# Altium PCB PCB1.PcbDoc (part 2 of 2)
Units mil, origin at the board's own origin, x right, y up, seen from the top; angles counter-clockwise.
Board outline 4538.24 x 3362.8 mil, 2 copper layers (Top Layer, Bottom Layer); 199 components, 229 nets, 1313 pads, 0 vias.
Unrouted connection lines stored in the file: 1024.
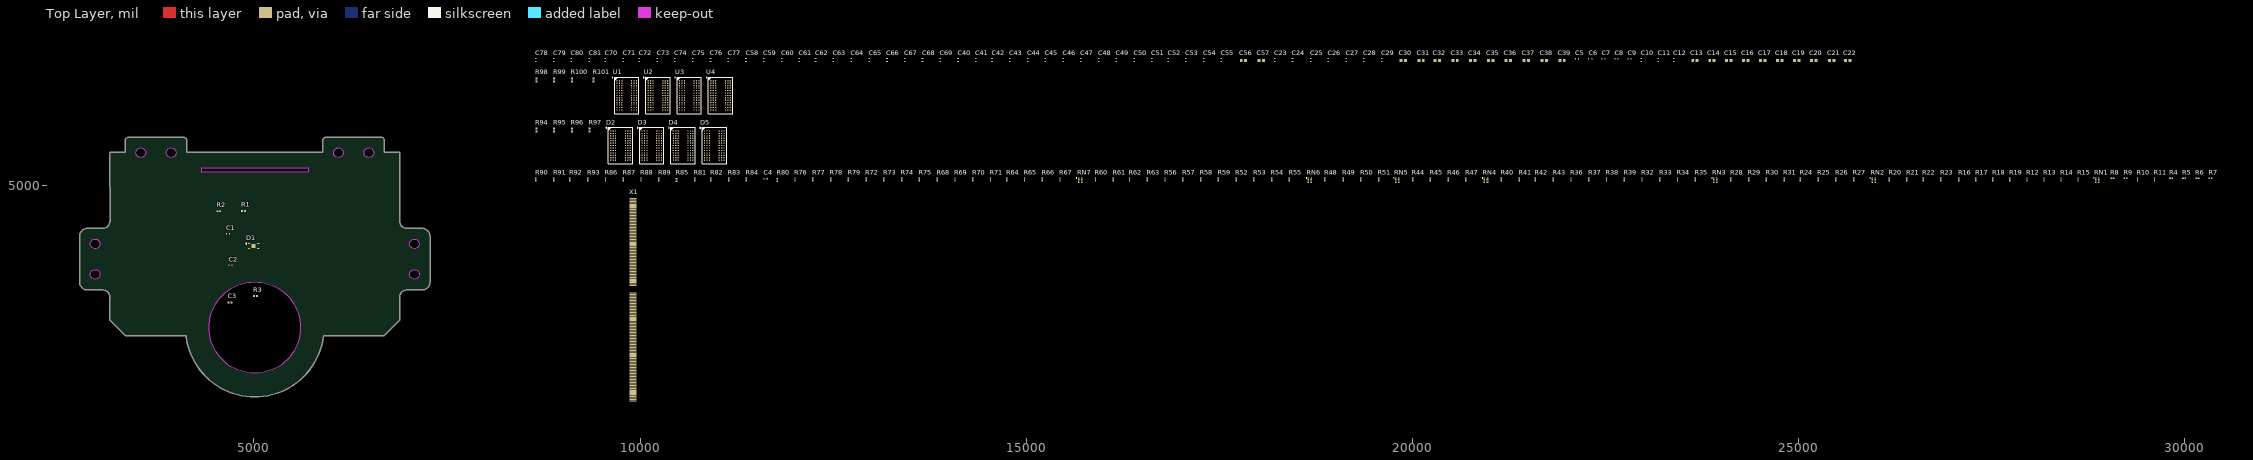
[diagram p0: Top Layer view]

## Nets (pads, with @x,y where several pads share a name; then routed paths per layer and width w, separated by ;. In a path a pad name is that pad's centre, name@x,y a point inside that pad or via, vN(x,y) a via of type N, cw(c..) or ccw(c..) an arc to the next point about the centre after c; other vN are vias at no path point) (continued)
GND: C1.2 C2.1 C13.1 C14.1 C15.1 C16.1 C17.1 C18.1 C19.1 C20.1 C21.1 C22.1 C30.1 C31.1 C32.1 C33.1 C34.1 C35.1 C36.1 C37.1 C38.1 C39.1 C40.1 C41.1 C42.1 C43.1 C44.1 C45.1 C46.1 C47.1 C48.1 C49.1 C50.1 C51.1 C52.1 C53.1 C54.1 C55.1 C58.1 C59.1 C60.1 C61.1 C62.1 C63.1 C64.1 C65.1 C66.1 C67.1 C68.1 C69.1 C70.1 C71.1 C72.1 C73.1 C74.1 C75.1 C76.1 C77.1 C78.1 C79.1 C80.1 C81.1 D1.4 D1.9 D2.A2 D2.A8 D2.A9 D2.C8 D2.D1 D2.D9 D2.E1 D2.E9 D2.G1 D2.G9 D2.H9 D2.K1 D2.K9 D2.N1 D3.A2 D3.A8 D3.A9 D3.C8 D3.D1 D3.D9 D3.E1 D3.E9 D3.G1 D3.G9 D3.H9 D3.K1 D3.K9 D3.N1 D4.A2 D4.A8 D4.A9 D4.C8 D4.D1 D4.D9 D4.E1 D4.E9 D4.G1 D4.G9 D4.H9 D4.K1 D4.K9 D4.N1 D5.A2 D5.A8 D5.A9 D5.C8 D5.D1 D5.D9 D5.E1 D5.E9 D5.G1 D5.G9 D5.H9 D5.K1 D5.K9 D5.N1 R94.1 R95.1 R96.1 R97.1 R98.1 R99.1 R100.1 R101.1 U1.A2 U1.A8 U1.A9 U1.C8 U1.D1 U1.D9 U1.E1 U1.E9 U1.G1 U1.G9 U1.H9 U1.K1 U1.K9 U1.N1 U2.A2 U2.A8 U2.A9 U2.C8 U2.D1 U2.D9 U2.E1 U2.E9 U2.G1 U2.G9 U2.H9 U2.K1 U2.K9 U2.N1 U3.A2 U3.A8 U3.A9 U3.C8 U3.D1 U3.D9 U3.E1 U3.E9 U3.G1 U3.G9 U3.H9 U3.K1 U3.K9 U3.N1 U4.A2 U4.A8 U4.A9 U4.C8 U4.D1 U4.D9 U4.E1 U4.E9 U4.G1 U4.G9 U4.H9 U4.K1 U4.K9 U4.N1 X1.1 X1.2 X1.5 X1.6 X1.9 X1.10 X1.14 X1.15 X1.18 X1.19 X1.22 X1.23 X1.26 X1.27 X1.30 X1.31 X1.35 X1.36 X1.39 X1.40 X1.43 X1.44 X1.47 X1.48 X1.51 X1.52 X1.56 X1.57 X1.60 X1.61 X1.64 X1.65 X1.68 X1.69 X1.72 X1.73 X1.77 X1.78 X1.81 X1.82 X1.85 X1.86 X1.89 X1.90 X1.93 X1.94 X1.98 X1.99 X1.102 X1.103 X1.106 X1.107 X1.167 X1.168 X1.171 X1.172 X1.175 X1.176 X1.180 X1.181 X1.184 X1.185 X1.188 X1.189 X1.192 X1.193 X1.196 X1.197 X1.201 X1.202 X1.205 X1.206 X1.209 X1.210 X1.213 X1.214 X1.217 X1.218 X1.222 X1.223 X1.226 X1.227 X1.230 X1.231 X1.234 X1.235 X1.238 X1.239 X1.243 X1.244 X1.247 X1.248 X1.251 X1.252
MEMRST: C1.1 D2.L1 D3.L1 D4.L1 D5.L1 R1.2 U1.L1 U2.L1 U3.L1 U4.L1
NetC4_1: C4.1 R80.2 R85.2
ODT0: D2.F3 D3.F3 D4.F3 D5.F3 RN1.2 U1.F3 U2.F3 U3.F3 U4.F3 X1.155
PARITY: D2.N3 D3.N3 D4.N3 D5.N3 RN6.2 U1.N3 U2.N3 U3.N3 U4.N3 X1.143
RESET_CONN: R1.1 X1.108
S0: D2.G7 D3.G7 D4.G7 D5.G7 RN1.1 U1.G7 U2.G7 U3.G7 U4.G7 X1.149
SA0: D1.1 X1.256
SA1: D1.2 X1.260
SA2: D1.3 X1.166
SCL: D1.6 X1.253
SDA: D1.5 X1.254
VDD: C4.2 C5.1 C6.1 C7.1 C8.1 C9.1 C10.1 C11.1 C12.1 C13.2 C14.2 C15.2 C16.2 C17.2 C18.2 C19.2 C20.2 C21.2 C22.2 C23.1 C24.1 C25.1 C26.1 C27.1 C28.1 C29.1 C56.1 C57.1 C58.2 C59.2 C60.2 C61.2 C62.2 C63.2 C64.2 C65.2 C66.2 C67.2 C68.2 C69.2 C70.2 C71.2 C72.2 C73.2 C74.2 C75.2 C76.2 C77.2 C78.2 C79.2 C80.2 C81.2 D2.A1 D2.B2 D2.B8 D2.C1 D2.C7 D2.C9 D2.E2 D2.E8 D2.F1 D2.F9 D2.H1 D2.J9 D2.M1 D2.N9 D3.A1 D3.B2 D3.B8 D3.C1 D3.C7 D3.C9 D3.E2 D3.E8 D3.F1 D3.F9 D3.H1 D3.J9 D3.M1 D3.N9 D4.A1 D4.B2 D4.B8 D4.C1 D4.C7 D4.C9 D4.E2 D4.E8 D4.F1 D4.F9 D4.H1 D4.J9 D4.M1 D4.N9 D5.A1 D5.B2 D5.B8 D5.C1 D5.C7 D5.C9 D5.E2 D5.E8 D5.F1 D5.F9 D5.H1 D5.J9 D5.M1 D5.N9 R2.2 U1.A1 U1.B2 U1.B8 U1.C1 U1.C7 U1.C9 U1.E2 U1.E8 U1.F1 U1.F9 U1.H1 U1.J9 U1.M1 U1.N9 U2.A1 U2.B2 U2.B8 U2.C1 U2.C7 U2.C9 U2.E2 U2.E8 U2.F1 U2.F9 U2.H1 U2.J9 U2.M1 U2.N9 U3.A1 U3.B2 U3.B8 U3.C1 U3.C7 U3.C9 U3.E2 U3.E8 U3.F1 U3.F9 U3.H1 U3.J9 U3.M1 U3.N9 U4.A1 U4.B2 U4.B8 U4.C1 U4.C7 U4.C9 U4.E2 U4.E8 U4.F1 U4.F9 U4.H1 U4.J9 U4.M1 U4.N9 X1.111 X1.112 X1.117 X1.118 X1.123 X1.124 X1.129 X1.130 X1.135 X1.136 X1.141 X1.142 X1.147 X1.148 X1.153 X1.154 X1.159 X1.160 X1.163
VDDSPD: C2.2 D1.8 X1.255
VPP: C30.2 C31.2 C32.2 C33.2 C34.2 C35.2 C36.2 C37.2 C38.2 C39.2 C40.2 C41.2 C42.2 C43.2 C44.2 C45.2 C46.2 C47.2 C48.2 C49.2 C50.2 C51.2 C52.2 C53.2 C54.2 C55.2 D2.B1 D2.M9 D3.B1 D3.M9 D4.B1 D4.M9 D5.B1 D5.M9 U1.B1 U1.M9 U2.B1 U2.M9 U3.B1 U3.M9 U4.B1 U4.M9 X1.257 X1.259
VREFCA: C5.2 C6.2 C7.2 C8.2 C9.2 C10.2 C11.2 C12.2 D2.J1 D3.J1 D4.J1 D5.J1 U1.J1 U2.J1 U3.J1 U4.J1 X1.164
VTT: C23.2 C24.2 C25.2 C26.2 C27.2 C28.2 C29.2 C56.2 C57.2 RN1.5 RN1.6 RN1.7 RN1.8 RN2.5 RN2.6 RN2.7 RN2.8 RN3.5 RN3.6 RN3.7 RN3.8 RN4.5 RN4.6 RN4.7 RN4.8 RN5.5 RN5.6 RN5.7 RN5.8 RN6.5 RN6.6 RN6.7 RN6.8 RN7.5 RN7.6 RN7.7 RN7.8 X1.258
ZQ0: D2.B9 R94.2
ZQ1: D3.B9 R95.2
ZQ2: D4.B9 R96.2
ZQ3: D5.B9 R97.2
ZQ4: R98.2 U1.B9
ZQ5: R99.2 U2.B9
ZQ6: R100.2 U3.B9
ZQ7: R101.2 U4.B9
pads on no net: D1.7 D2.A3 D2.F2 D2.G2 D2.G8 D2.N7 D3.A3 D3.F2 D3.G2 D3.G8 D3.N7 D4.A3 D4.F2 D4.G2 D4.G8 D4.N7 D5.A3 D5.F2 D5.G2 D5.G8 D5.N7 RN1.3 RN4.4 U1.A3 U1.F2 U1.G2 U1.G8 U1.N7 U2.A3 U2.F2 U2.G2 U2.G8 U2.N7 U3.A3 U3.F2 U3.G2 U3.G8 U3.N7 U4.A3 U4.F2 U4.G2 U4.G8 U4.N7 X1.87 X1.88 X1.91 X1.92 X1.95 X1.96 X1.97 X1.100 X1.101 X1.104 X1.105 X1.110 X1.134 X1.157 X1.161 X1.162 X1.165

## Silkscreen, mask and mechanical layers (free items; w line width, h text height)
Mechanical 16:
  drawing of 1874 lines, arcs and shapes, not listed
  text "1" at 1427,7465 h70
  text "2" at 4287,7465 h70
  text "3" at 7167,7465 h70
  text "4" at 10037,7465 h70
  text "A" at 75,6559 h70
  text "A" at 11375,6559 h70
  text "B" at 75,4667 h70
  text "B" at 11375,4667 h70
  text "C" at 75,2757 h70
  text "C" at 11375,2757 h70
  text "ENGINEER:" at 6850,1300 h45
  text "TITLE:" at 8350,1300 h45
  text "PCB DESIGNER:" at 6850,1005 h45
  text "D" at 75,867 h70
  text "D" at 11375,867 h70
  text "DATE:" at 6850,700 h45
  text "PART NO.:" at 8350,700 h45
  text "REV:" at 10450,700 h45
  text "Altium Limited" at 5550,600 h70
  text ".PRINT_DATE" at 6900,580 h70
  text "12a Rodborough Rd" at 5550,500 h70
  text "Frenchs Forest" at 5550,400 h70
  text "FILE NAME:" at 6850,400 h45
  text "DWG NO:" at 8350,400 h45
  text "SCALE:" at 10450,400 h45
  text "NSW 2086" at 5550,300 h70
  text ".PCB_FILE_NAME_NO_PATH" at 6900,280 h70
  text "1" at 1427,65 h70
  text "2" at 4287,65 h70
  text "3" at 7167,65 h70
  text "4" at 10037,65 h70